# Altium PCB PCB.PcbDoc
Units mil, origin at the board's own origin, x right, y up, seen from the top; angles counter-clockwise.
Board outline 2735 x 1695 mil, 4 copper layers (Top Layer, Power, GND, Bottom Layer), stack 23.756 mil thick; 5 components, 24 nets, 97 pads, 18 vias.
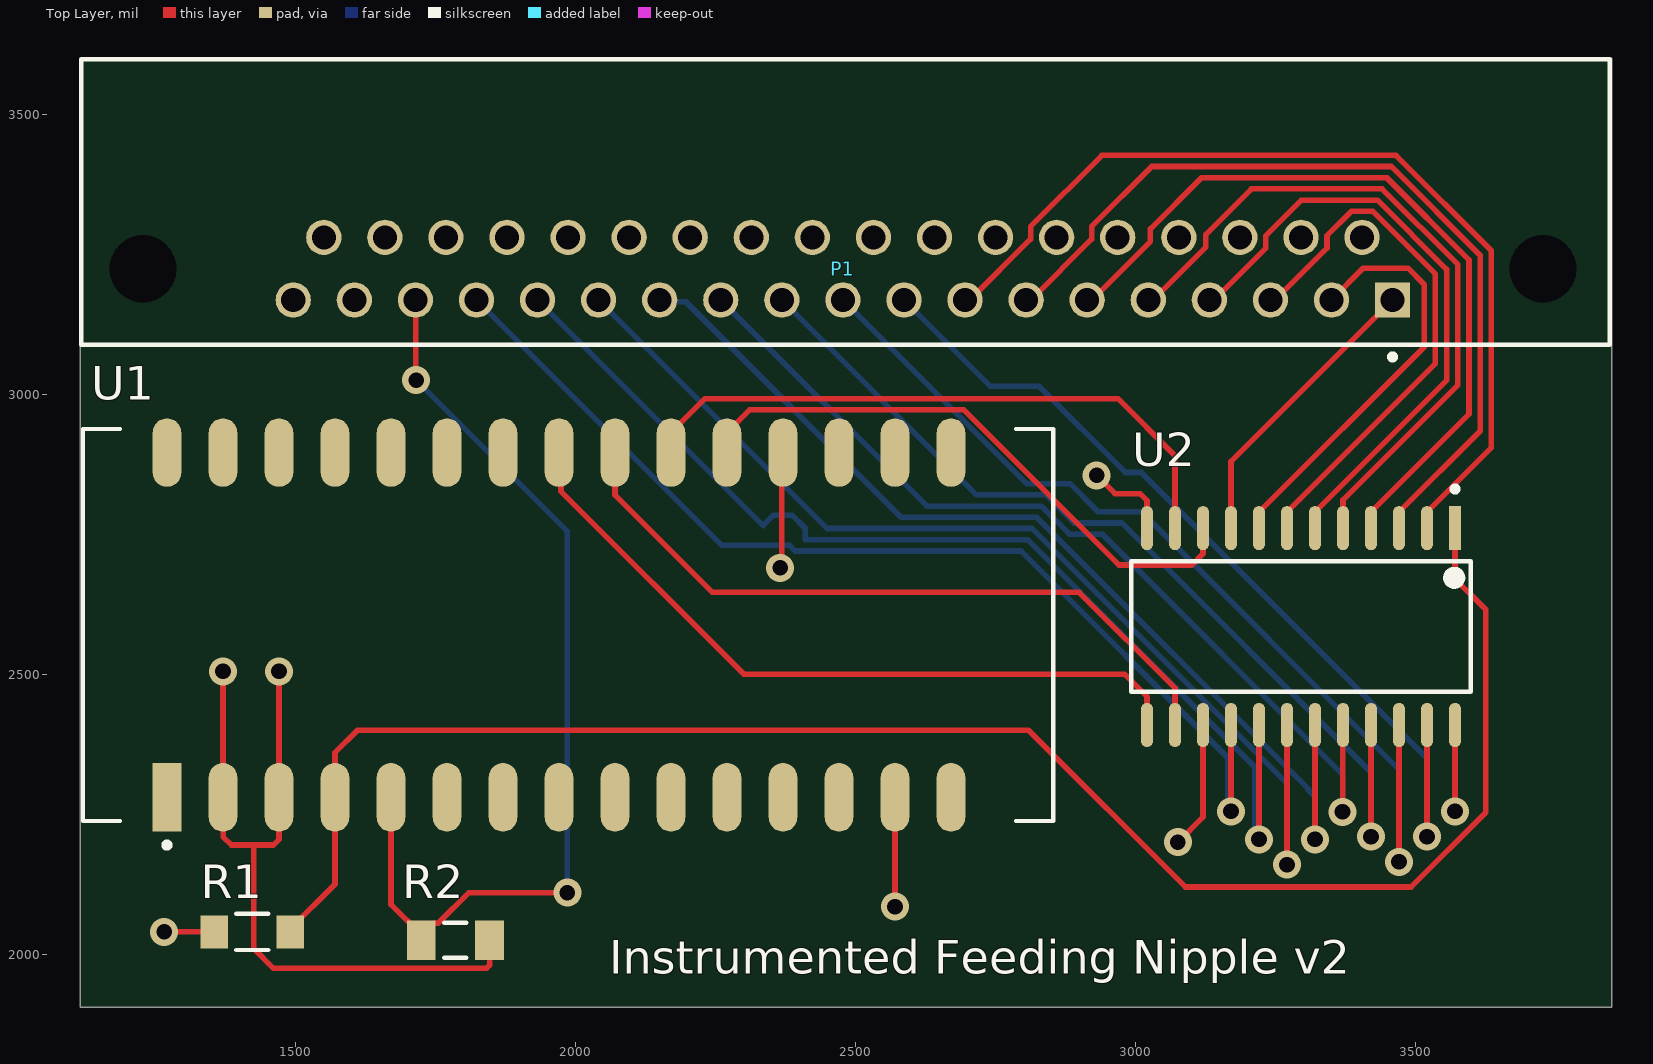
[diagram p0: Top Layer view]
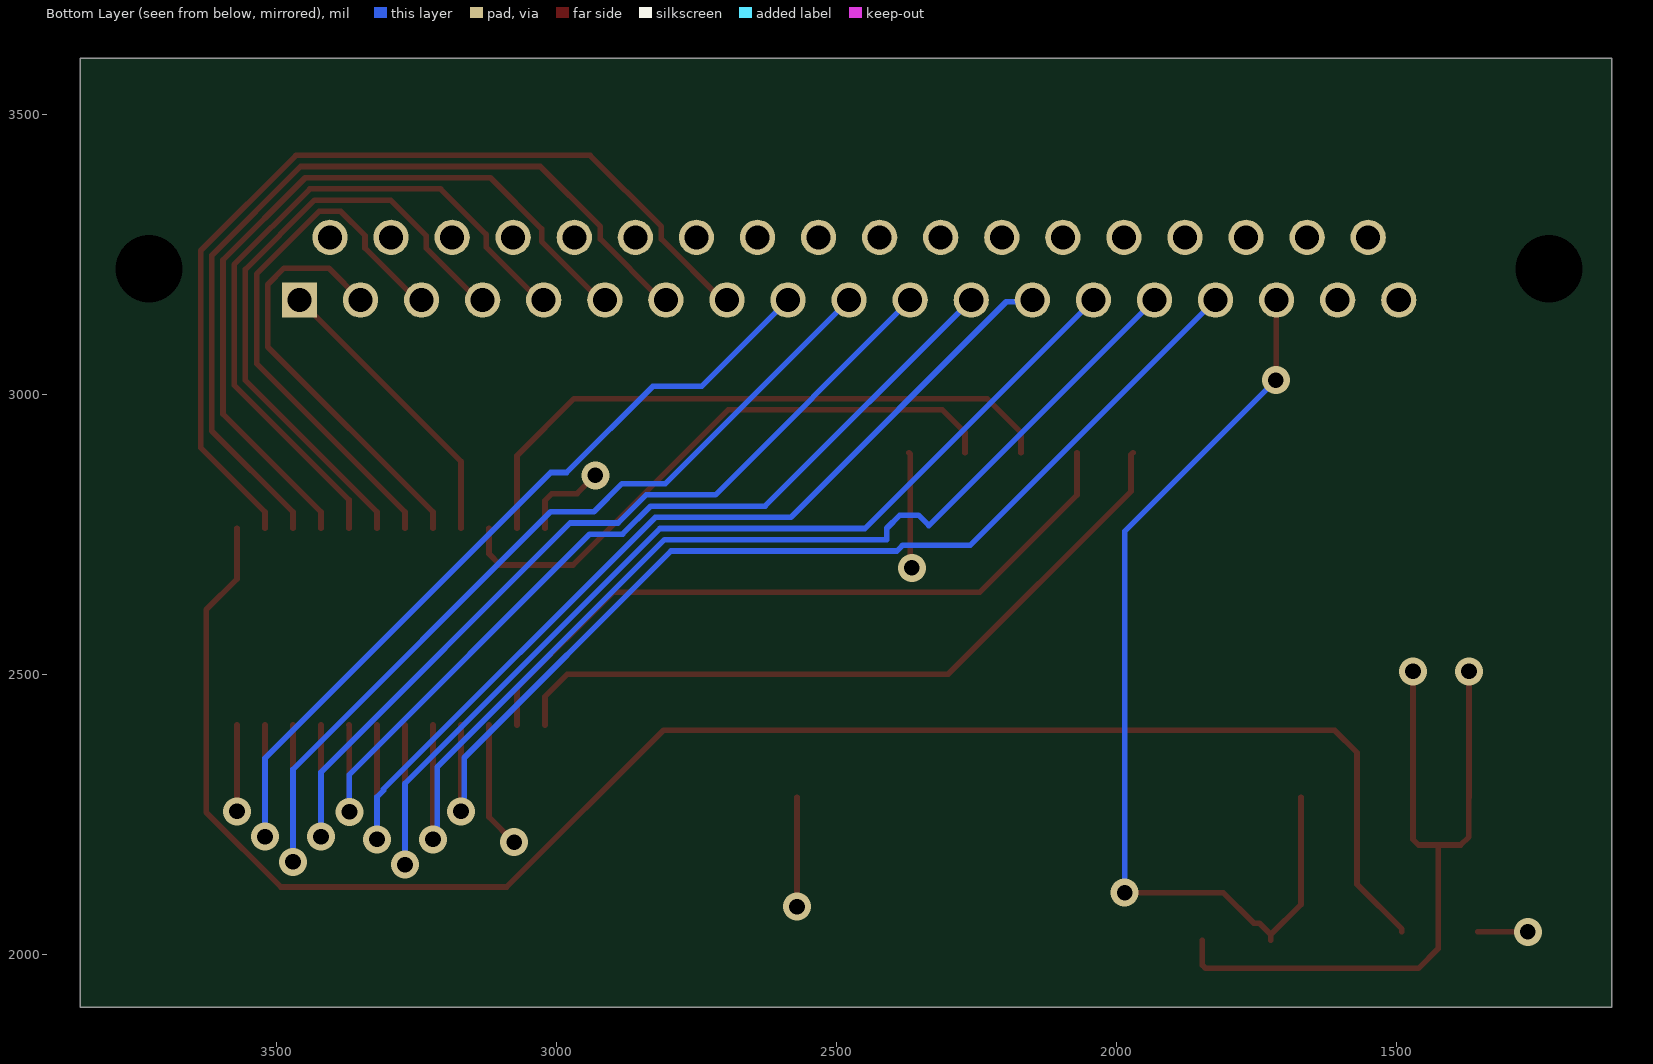
[diagram p1: Bottom Layer view, seen from below]
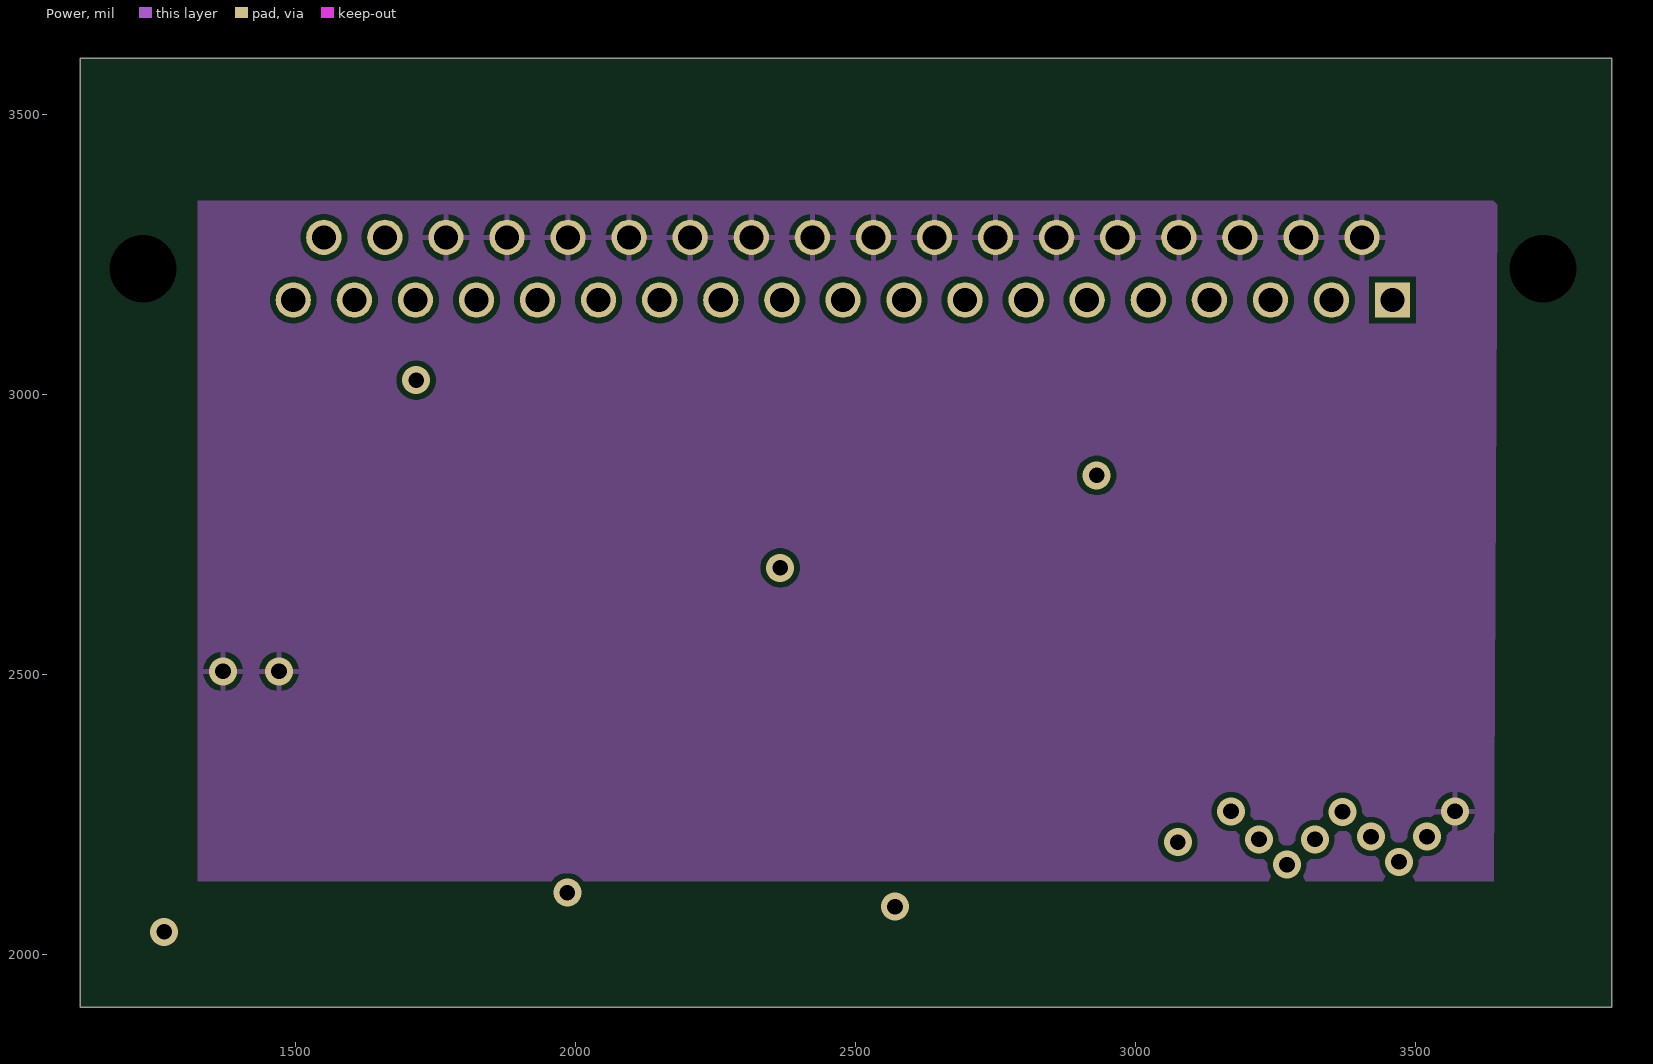
[diagram p2: Power]
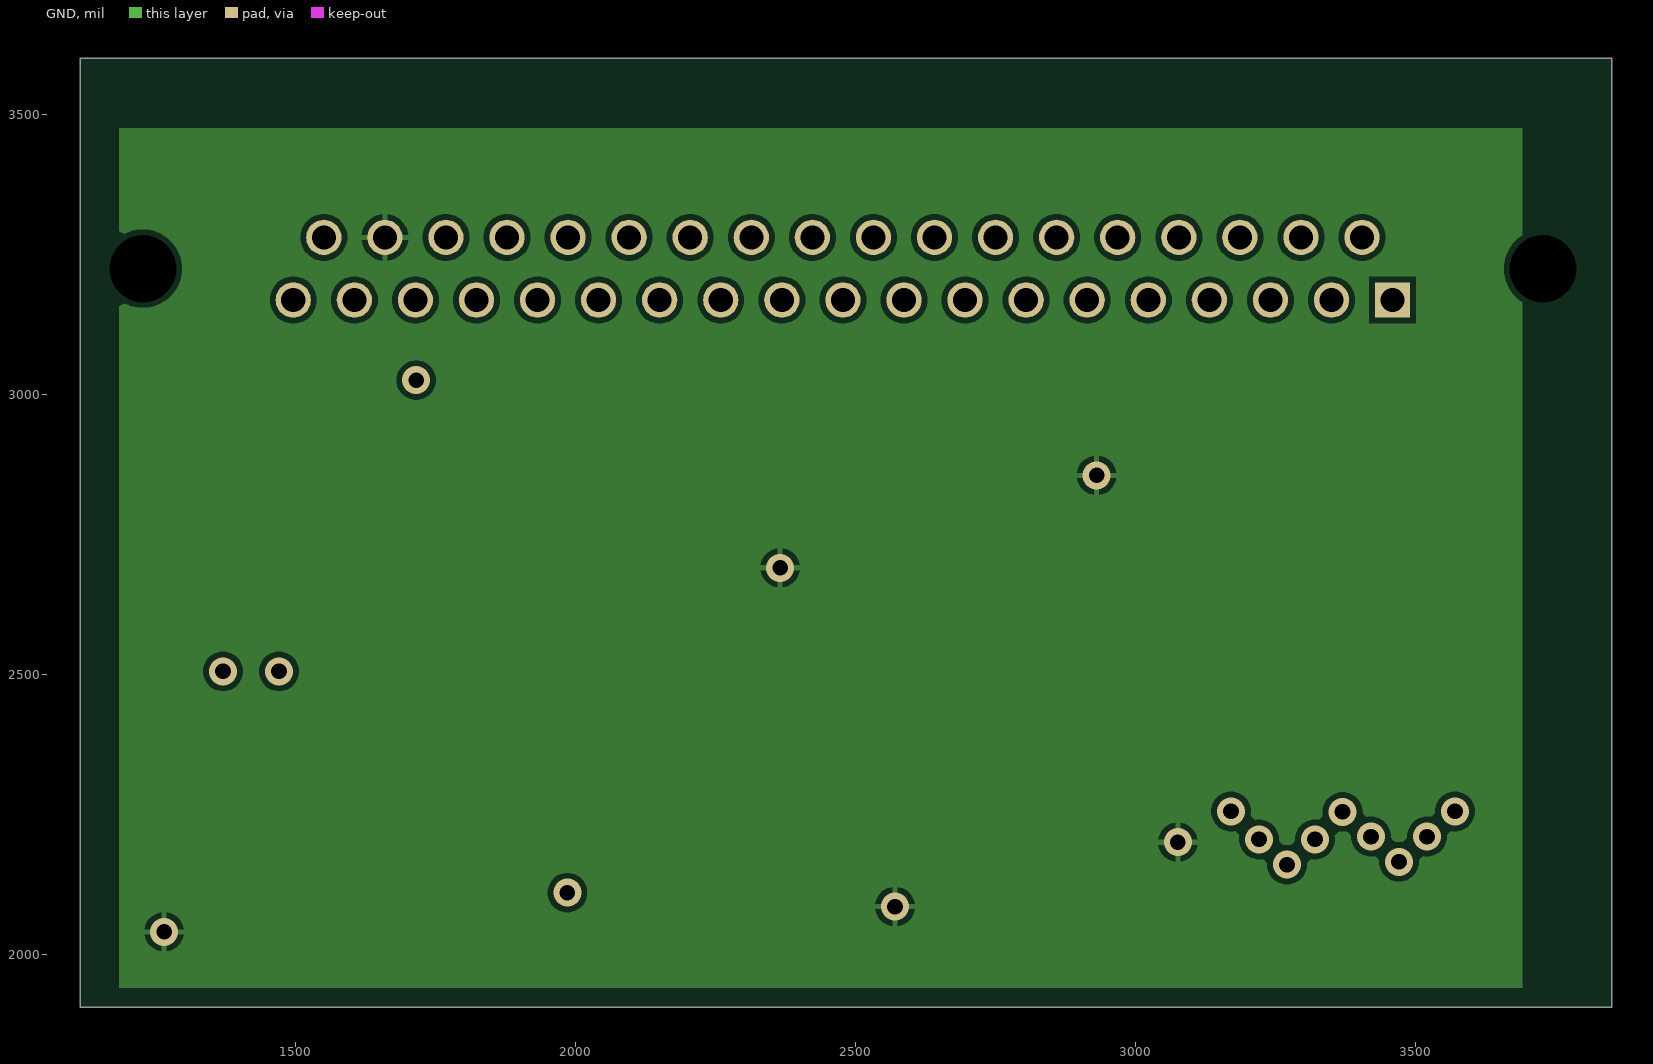
[diagram p3: GND]
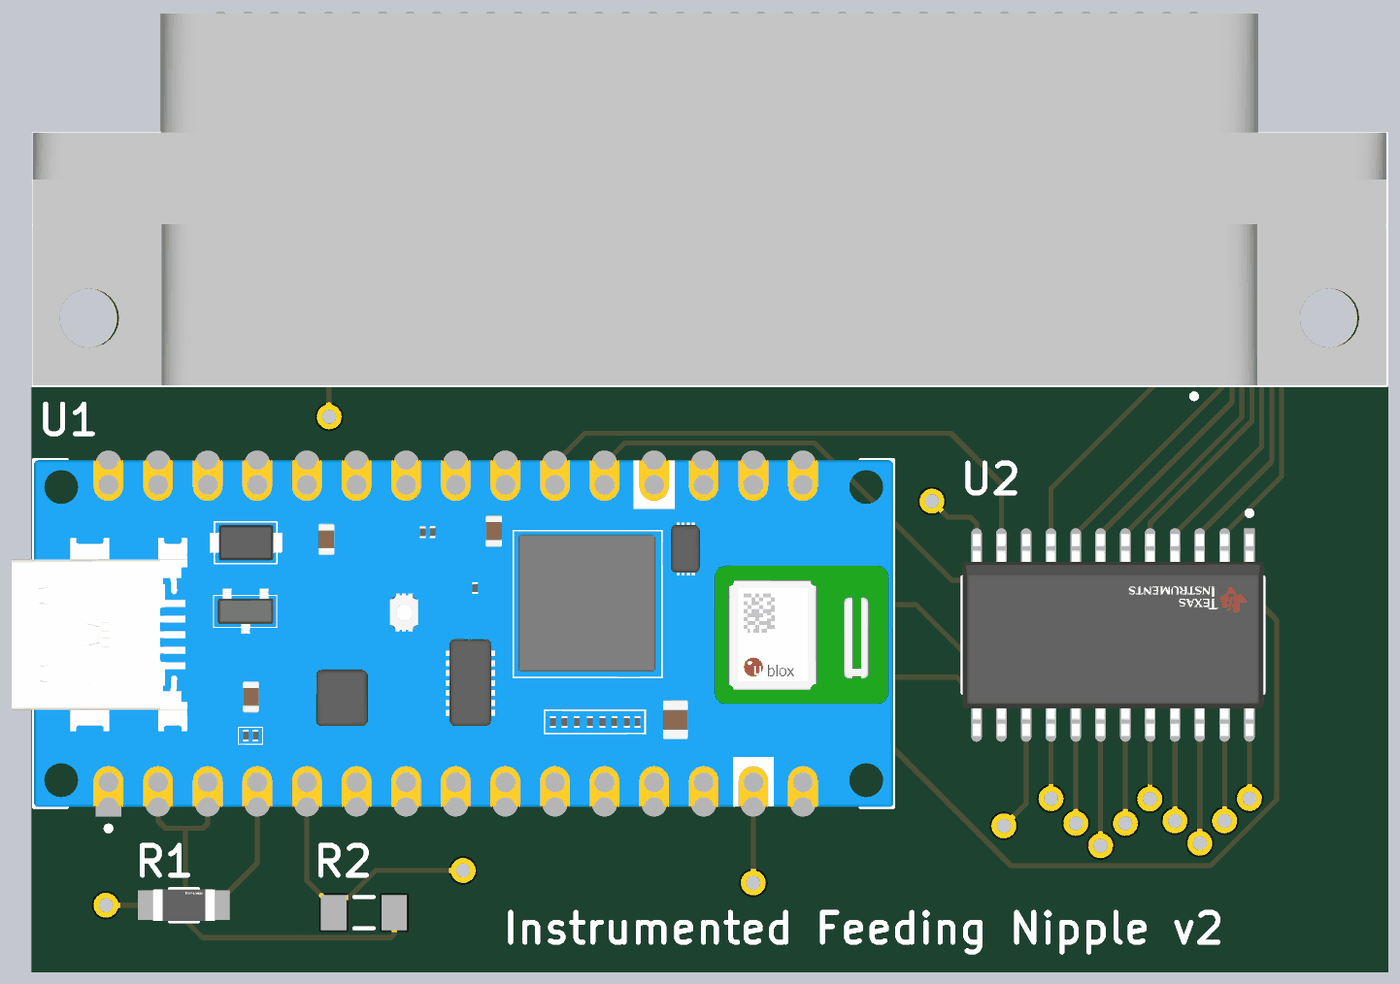
[diagram p4: 3D render of the assembled board from above, using the file's embedded part models]

## Layer stack, top to bottom
Top Solder: solder mask 0.4, Solder Resist, Dk 3.5
Top Layer: signal copper 1.4
Dielectric 2: prepreg 2.8, PP-006, Dk 4.1
Power: signal copper 1.378
Dielectric 1: dielectric 12.6, FR-4, Dk 4.8
GND: signal copper 1.378
Dielectric 3: prepreg 2.8, PP-006, Dk 4.1
Bottom Layer: signal copper 1.4
Bottom Solder: solder mask 0.4, Solder Resist, Dk 3.5

## Board outline
1115,1905 3850,1905 3850,3600 1115,3600

## Design rules (kind name [scope] priority, off if disabled: settings)
Clearance [All] p1: gap=10 ignorepadtopadclearanceinfootprint=FALSE
PolygonConnect [All] p1: connectstyle=Relief reliefconductorwidth=10 reliefentries=4 polygonreliefangle="90 Angle" airgapwidth=10
RoutingVias [All] p1: holewidth=28 width=50 viastyle="Through Hole" minholewidth=28 minwidth=50 maxholewidth=28 maxwidth=50
SolderMaskExpansion [All] p1: expansion=4 istentingtop=FALSE
SupplyNets "Schematic Supply Nets_1" [InNet('VCC +3.3')] p1: voltage=0.000
SupplyNets "Schematic Supply Nets" [InNet('GND')] p2: voltage=0.000
Width [All] p1: maxlimit=10 minlimit=10 preferedwidth=10
30 further rules are at their usual default settings.

## Components (designator, comment, footprint, x,y, rotation, side; value= is the part's Value field where it differs from the comment)
P1 "182-037-113R531" NORCO-182-037-113R531_V 2476.97,3224.09 r180 top
R1 "ERJ-S08F3300V" FP-ERJS08-MFG 1422.09,2040 r0 top value=330
R2 "CRCW120610K0JNEA" RESC3216X60X45ML10T20 1785,2025 r180 top value=10k
U1 "ABX00027" FP-ABX00027-MFG 1986.14,2587.87 r90 top
U2 "CD74HC4067M96" FP-DW0024A-IPC_C 3295,2585 r270 top

## Footprints (in the part's own frame and the unit in brackets; to place one, negate y for a bottom-side part, rotate by r counter-clockwise, add the part's x,y. Pads: shape width x height; smd on the part's side, far side on the other; paste and mask are expansions set on the pad)
FP-ABX00027-MFG [mm]
  rect 3.111x1.295 smd paste+0 mask+0: 1(-7.82,18.19)
  rrect100% 3.111x1.295 smd paste+0 mask+0: 2(-7.82,15.65) 3(-7.82,13.11) 4(-7.82,10.57) 5(-7.82,8.03) 6(-7.82,5.49) 7(-7.82,2.95) 8(-7.82,0.41) 9(-7.82,-2.13) 10(-7.82,-4.67) 11(-7.82,-7.21) 12(-7.82,-9.75) 13(-7.82,-12.29) 14(-7.82,-14.83) 15(-7.82,-17.37) 16(7.82,-17.37) 17(7.82,-14.83) 18(7.82,-12.29) 19(7.82,-9.75) 20(7.82,-7.21) 21(7.82,-4.67) 22(7.82,-2.13) 23(7.82,0.41) 24(7.82,2.95) 25(7.82,5.49) 26(7.82,8.03) 27(7.82,10.57) 28(7.82,13.11) 29(7.82,15.65) 30(7.82,18.19)
  silkscreen extent -10.11,-22 8.89,22, body extent -9.48,-22.1 9.48,23.24, height 0.25
FP-DW0024A-IPC_C [mil]
  rect 78.85x21.34 smd paste+0 mask+0: 1(-175.81,275)
  rrect100% 78.85x21.34 smd paste+0 mask+0: 2(-175.81,225) 3(-175.81,175) 4(-175.81,125) 5(-175.81,75) 6(-175.81,25) 7(-175.81,-25) 8(-175.81,-75) 9(-175.81,-125) 10(-175.81,-175) 11(-175.81,-225) 12(-175.81,-275) 13(175.81,-275) 14(175.81,-225) 15(175.81,-175) 16(175.81,-125) 17(175.81,-75) 18(175.81,-25) 19(175.81,25) 20(175.81,75) 21(175.81,125) 22(175.81,175) 23(175.81,225) 24(175.81,275)
  silkscreen extent -251,-303 117,303, body extent -219,-307 219,307, height 10
FP-ERJS08-MFG [mm]
  rect 1.25x1.5 smd paste+0 mask+0: 1(-1.725,0) 2(1.725,0)
  silkscreen extent -0.72,-0.82 0.72,0.82, body extent -2.45,-0.92 2.45,0.92, height 0.25
NORCO-182-037-113R531_V [mm] "Connector, 37-Leads, Body 69.317x12.954mm, Pitch 1.385mm"
  rect 1.6x1.6 hole 1.09: 1(-24.93,1.42)
  round 1.6 hole 1.09: 2(-22.16,1.42) 3(-19.39,1.42) 4(-16.62,1.42) 5(-13.85,1.42) 6(-11.08,1.42) 7(-8.31,1.42) 8(-5.54,1.42) 9(-2.77,1.42) 10(0,1.42) 11(2.77,1.42) 12(5.54,1.42) 13(8.31,1.42) 14(11.08,1.42) 15(13.85,1.42) 16(16.62,1.42) 17(19.39,1.42) 18(22.16,1.42) 19(24.93,1.42) 20(-23.545,-1.42) 21(-20.775,-1.42) 22(-18.005,-1.42) 23(-15.235,-1.42) 24(-12.465,-1.42) 25(-9.695,-1.42) 26(-6.925,-1.42) 27(-4.155,-1.42) 28(-1.385,-1.42) 29(1.385,-1.42) 30(4.155,-1.42) 31(6.925,-1.42) 32(9.695,-1.42) 33(12.465,-1.42) 34(15.235,-1.42) 35(18.005,-1.42) 36(20.775,-1.42) 37(23.545,-1.42)
  round 0 hole 3.05: S1(-31.75,0) S2(31.75,0)
  silkscreen extent -34.77,-9.5 34.54,4.13, body extent -34.77,-15.7 34.54,3.45, height 12.56
RESC3216X60X45ML10T20 [mm] "Chip Resistor, 2-Leads, Body 3.20x1.60mm, IPC Low Density"
  rect 1.3x1.8 smd: 1(-1.55,0) 2(1.55,0)
  silkscreen extent -0.5,-0.8 0.5,0.8, body extent -1.65,-0.85 1.65,0.85, height 0.6

## Part data
P1: library part CMP-002-00072-1, "Conn D-Subminiature M 37 POS 2.77mm Solder RA Thru-Hole 37 Terminal 1 Port", Max Operating Temperature=105°C, Min Operating Temperature=-55°C, Connector Type="D-Sub, Plug, Signal", Gender=Male, Mounting Technology="Through Hole", Pins=37
R1: library part CMP-009-00184-1, "Res Thick Film 1206 330 Ohm 1% 0.25W ±100ppm/°C Molded SMD Punched Carrier T/R", Case/Package=1206, Max Operating Temperature=155°C, Min Operating Temperature=-55°C, Tolerance=1%, Voltage Rating=200V, Mounting Technology="Surface Mount"
R2: library part CMP-009-00187-1, "250mW Thick Film Resistors 200V ±5% ±200ppm/℃ 10kΩ 1206 Chip Resistor - Surface Mount ROHS", Case/Package=1206, Max Operating Temperature=155°C, Min Operating Temperature=-55°C, Tolerance=5%, Voltage Rating=200V, Mounting Technology="Surface Mount", Pins=2
U1: library part CMP-020-00023-1, "SBC, Arduino Nano 33 IOT, SAMD21G18A, 32bit, 32KB RAM, 256KB Flash, 14 I/O pins", Frequency=48MHz, Max Supply Voltage=21V, Min Supply Voltage=4.5V, Interface="I2C, SPI, UART, USB", RAM Size=32kB
U2: library part CMP-016-00011-2, "5V, 16:1 mux, single channel analog multiplexer, 24-SOIC, -55 to 125C", Case/Package=SOIC, Max Operating Temperature=125°C, Max Supply Voltage=6V, Min Operating Temperature=-55°C, Min Supply Voltage=2V, Nominal Supply Current=8µA, Mounting Technology="Surface Mount", Pins=24

## Via types
v1: diameter 50, hole 28, Top Layer to Bottom Layer, 18 vias

## Nets (pads, with @x,y where several pads share a name; then routed paths per layer and width w, separated by ;. In a path a pad name is that pad's centre, name@x,y a point inside that pad or via, vN(x,y) a via of type N, cw(c..) or ccw(c..) an arc to the next point about the centre after c; other vN are vias at no path point)
FSR1: P1.1 U2.9 | length 526.9
  Top Layer w10: U2.9 3170,2879.72 P1.1
FSR2: P1.2 U2.8 | length 758.4
  Top Layer w10: U2.8 3220,2789.56 3515,3084.56 3515,3195.86 3485.86,3225 3406.22,3225 P1.2
FSR3: P1.3 U2.7 | length 983.3
  Top Layer w10: P1.3 3248.83,3168.19 3341.38,3260.74 3341.38,3283.2 3384.68,3326.5 3423.2,3326.5 3535,3214.69 3535,3054.56 3270,2789.56 U2.7
FSR4: P1.4 U2.6 | length 1121.4
  Top Layer w10: P1.4 3139.77,3168.19 3232.32,3260.74 3232.32,3283.2 3295.62,3346.5 3431.48,3346.5 3555,3222.98 3555,3024.56 3320,2789.56 U2.6
FSR5: P1.5 U2.5 | length 1259.4
  Top Layer w10: P1.5 3030.72,3168.19 3125.18,3262.65 3125.18,3285.11 3206.57,3366.5 3439.76,3366.5 3575,3231.26 3575,3016.28 3370,2811.28 U2.5
FSR6: P1.6 U2.4 | length 1397.5
  Top Layer w10: P1.6 2921.66,3168.19 3026.12,3272.65 3026.12,3295.11 3117.51,3386.5 3448.05,3386.5 3595,3239.54 3595,2964.56 3420,2789.56 U2.4
FSR7: P1.7 U2.3 | length 1535.5
  Top Layer w10: P1.7 2812.61,3168.19 2921.22,3276.8 2921.22,3299.26 3028.46,3406.5 3456.33,3406.5 3615,3247.83 3615,2934.56 3470,2789.56 U2.3
FSR8: P1.8 U2.2 | length 1673.6
  Top Layer w10: P1.8 2703.55,3168.19 2812.17,3276.8 2812.17,3299.26 2939.4,3426.5 3464.62,3426.5 3635,3256.11 3635,2904.56 3520,2789.56 U2.2
FSR9: P1.9 U2.23 | length 1612.1
  Top Layer w10: v1(3520,2210) U2.23
  Bottom Layer w10: P1.9 2740.19,3014.02 2827.54,3014.02 2981.33,2860.24 3009.76,2860.24 3520,2350 v1(3520,2210)
FSR10: P1.10 U2.22 | length 1749.4
  Top Layer w10: v1(3470,2165) U2.22
  Bottom Layer w10: P1.10 2804.92,2840.24 2882.34,2840.24 2932.58,2790 3010,2790 3470,2330 v1(3470,2165)
FSR11: P1.11 U2.21 | length 1715.5
  Top Layer w10: v1(3420,2210) U2.21
  Bottom Layer w10: P1.11 2715.87,2820.24 2839.47,2820.24 2889.71,2770 2975,2770 3420,2325 v1(3420,2210)
FSR12: P1.12 U2.20 | length 1683.2
  Top Layer w10: v1(3369.22,2254.22) 3369.61,2254.61 3369.61,2408.8 U2.20
  Bottom Layer w10: P1.12 2626.81,2800.24 2831.19,2800.24 2881.42,2750 2940,2750 3369.22,2320.78 v1(3369.22,2254.22)
FSR13: P1.13 U2.19 | length 1819.1
  Top Layer w10: v1(3320,2205) U2.19
  Bottom Layer w10: P1.13 2153,3164.99 2196.3,3164.99 2581.06,2780.24 2822.9,2780.24 3308.28,2294.85 3308.28,2292.54 3320,2280.82 v1(3320,2205)
FSR14: P1.14 U2.18 | length 1980.9
  Top Layer w10: v1(3270,2160) U2.18
  Bottom Layer w10: P1.14 2448.7,2760.24 2814.62,2760.24 3270,2304.85 v1(3270,2160)
FSR15: P1.15 U2.17 | length 1990
  Top Layer w10: v1(3220,2205) U2.17
  Bottom Layer w10: P1.15 2334.5,2765.38 2353.13,2784.02 2386.27,2784.02 2409.7,2760.59 2409.7,2740.24 2806.33,2740.24 3212.43,2334.14 3212.43,2212.57 v1(3220,2205)
FSR16: P1.16 U2.16 | length 1932.5
  Top Layer w10: v1(3170,2255) U2.16
  Bottom Layer w10: P1.16 2260.83,2730 2381.57,2730 2391.57,2720 2795,2720 3164.22,2350.78 3164.22,2260.78 v1(3170,2255)
GND: P1.36 R1.1 U1.14 U1.19 U2.12 U2.15 | length 877.7
  Top Layer w10: v1(1265,2040) R1.1 ; v1(2365,2690) 2367.5,2692.5 2367.5,2893.25 U1.19 ; v1(2570,2085) U1.14 ; v1(2930,2855) 2962.65,2822.35 3007.65,2822.35 3020,2810 U2.12 ; v1(3075,2200) 3120,2245 U2.15
mux_out: R1.2 U1.4 U2.1 | length 3126.1
  Top Layer w10: R1.2 1490,2044.92 1570,2124.92 U1.4 1570,2360 1610,2400 2808.43,2400 3088.43,2120 3491.57,2120 3625,2253.43 3625,2615 3570,2670 U2.1
mux_S0: U1.20 U2.10 | length 1071.3
  Top Layer w10: U1.20 2270,2931.5 2310.49,2971.98 2693.02,2971.98 2970,2695 3100,2695 3120,2715 U2.10
mux_S1: U1.21 U2.11 | length 1132.2
  Top Layer w10: U1.21 2170,2931.5 2230.49,2991.98 2968.02,2991.98 3070,2890 U2.11
mux_S2: U1.22 U2.14 | length 1284.5
  Top Layer w10: U1.22 2070,2820 2243.86,2646.14 2898.86,2646.14 3070,2475 U2.14
mux_S3: U1.23 U2.13 | length 1319.8
  Top Layer w10: U1.23 1973.63,2892.12 1973.63,2826.37 2300,2500 2980,2500 3020,2460 U2.13
therm_out: P1.17 R2.2 U1.5 | length 1740.1
  Top Layer w10: U1.5 1670,2088.82 R2.2@1723.98,2034.84 ; P1.17 1714.29,3167.48 1714.29,3025.71 v1(1715,3025) ; R2.2 R2.2@1723.98,2034.84 ; v1(1985,2110) 1808.98,2110 1754.41,2055.43 1744.57,2055.43 R2.2@1723.98,2034.84
  Bottom Layer w10: v1(1715,3025) 1985,2755 v1(1985,2110)
"VCC +3.3": P1.20 P1.21 P1.22 P1.23 P1.24 P1.25 P1.26 P1.27 P1.28 P1.29 P1.30 P1.31 P1.32 P1.33 P1.34 P1.35 R2.1 U1.2 U1.3 U2.24 | length 1527.3
  Top Layer w10: v1(1370,2505) U1.2 1370.38,2279.62 1370.38,2209.62 1385,2195 1425,2195 ; v1(1470,2505) 1470,2205 1460,2195 1425,2195 ; R2.1 1846.02,1980.42 1840.17,1974.57 1460.43,1974.57 1425,2010 1425,2195 ; v1(3570,2255) U2.24
pads on no net: P1.18 P1.19 P1.37 P1.S1 P1.S2 U1.1 U1.6 U1.7 U1.8 U1.9 U1.10 U1.11 U1.12 U1.13 U1.15 U1.16 U1.17 U1.18 U1.24 U1.25 U1.26 U1.27 U1.28 U1.29 U1.30

## Polygon pours and split planes (outlines as drawn)
"VCC +3.3" on Power "VCC_+3.3_L02_P000" (solid, pour order 0): 1325,3345 1325,2130 3639.46,2130 3645.12,3345
GND on GND "GND_L03_P001" (solid, pour order 1): 1185,1940 3690,1940 3690,3475 1185,3475

## Silkscreen, mask and mechanical layers (free items; w line width, h text height)
Top Overlay:
  text "Instrumented Feeding Nipple v2" at 2060,1964.99 h60